# Altium PCB Sandshark 3D R1.2.PcbDoc (part 2 of 3)
Units mil, origin at the board's own origin, x right, y up, seen from the top; angles counter-clockwise.
Board outline 4143.89 x 2810.03 mil, 5 copper layers (Top Layer, Mid-Layer 1, Groun Plane, Power Plane, Bottom Layer), stack 75.73 mil thick; 280 components, 177 nets, 885 pads, 474 vias.
Unrouted connection lines stored in the file: 15.
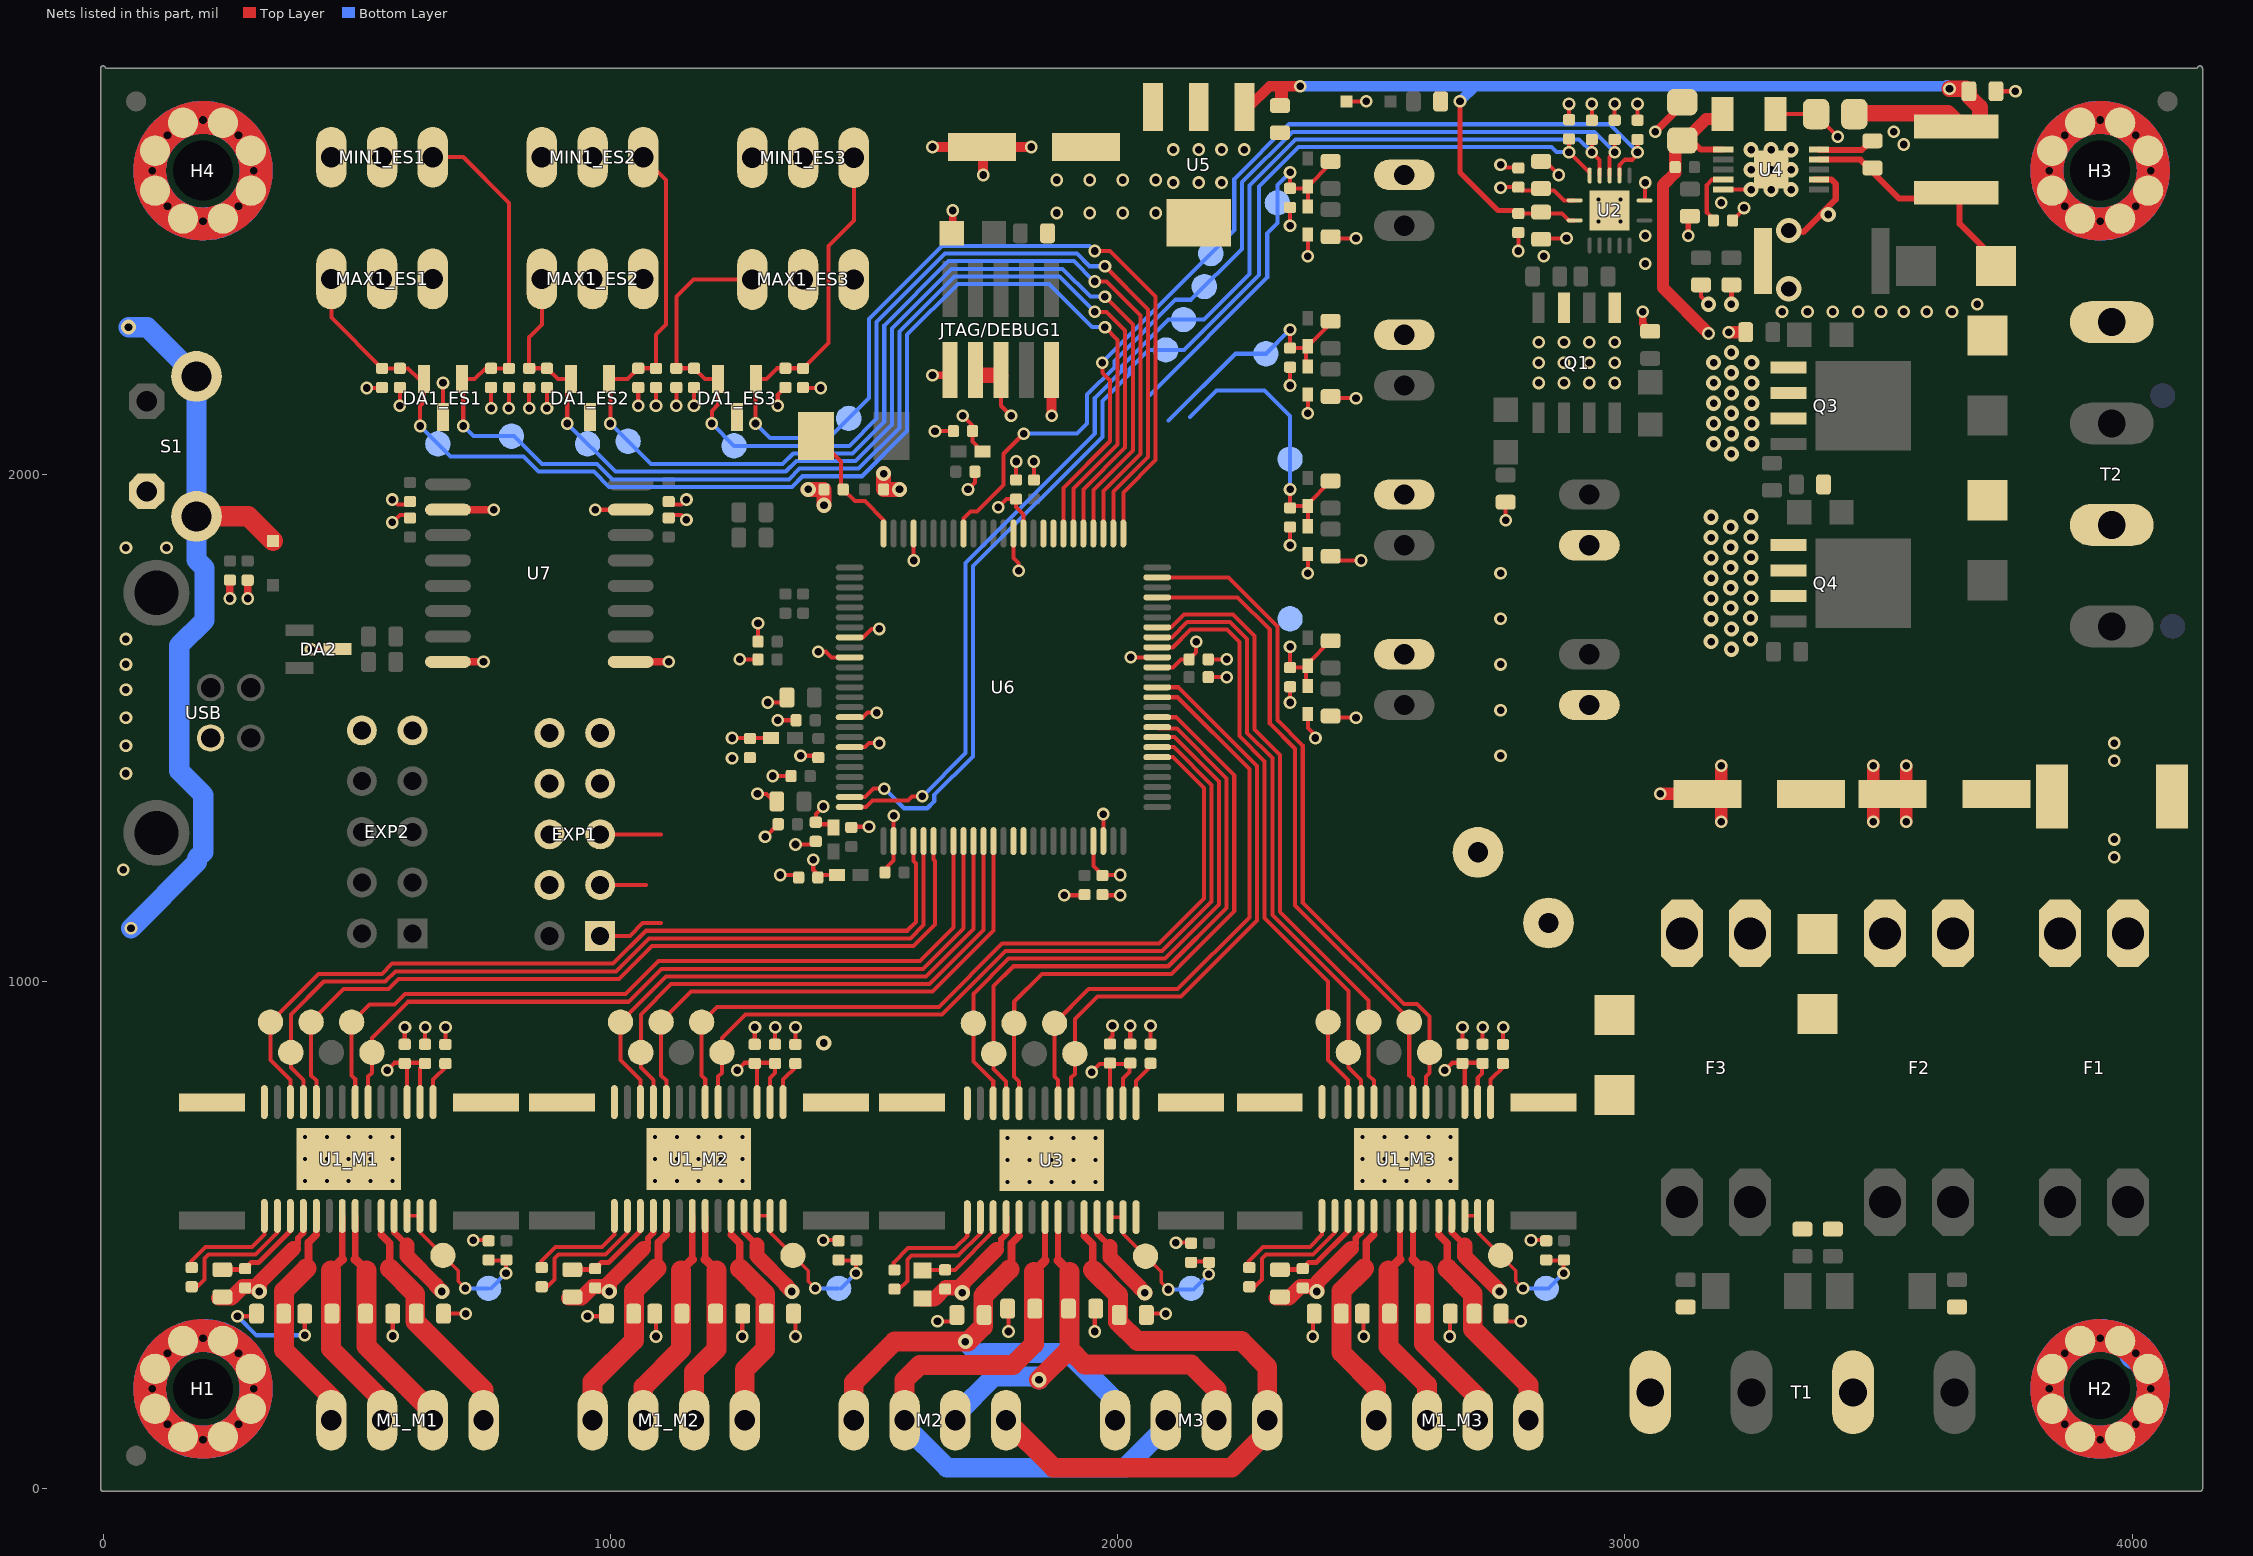
[diagram p4: the nets of this part, all layers, seen from the top]

## Via types
v1: diameter 25, hole 15, Top Layer to Bottom Layer, 243 vias
v2: diameter 30, hole 15, Top Layer to Bottom Layer, tented both sides, 72 vias
v3: diameter 19.68, hole 7.87, Top Layer to Bottom Layer, 64 vias
v4: diameter 25, hole 15, Top Layer to Bottom Layer, tented both sides, 51 vias
v5: diameter 30, hole 15, Top Layer to Bottom Layer, tented bottom, 32 vias
v6: diameter 30, hole 15, Top Layer to Bottom Layer, 10 vias
v7: diameter 50, hole 30, Top Layer to Bottom Layer, 2 vias

## Nets (pads, with @x,y where several pads share a name; then routed paths per layer and width w, separated by ;. In a path a pad name is that pad's centre, name@x,y a point inside that pad or via, vN(x,y) a via of type N, cw(c..) or ccw(c..) an arc to the next point about the centre after c; other vN are vias at no path point)
3.3VCC: C10_M1.1 C10_M2.1 C10_M3.1 C11_M1.1 C11_M2.1 C11_M3.1 C13.2 C16.2 C24.1 C25.1 C33.1 C41.2 C48.2 C49.2 C50.2 C52.2 C53.2 C55.2 EXP2.10 FB1.2 FB2.2 FB3.1 FB4.1 JTAG/DEBUG1.1 MAX1_ES1.3 MAX1_ES2.3 MAX1_ES3.3 MIN1_ES1.3 MIN1_ES2.3 MIN1_ES3.3 R1_ES1.2 R1_ES2.2 R1_ES3.2 R2_ES1.2 R2_ES2.2 R2_ES3.2 R30.2 R34.1 R41.2 R43_U_TR1.2 R43_U_TR2.2 R43_U_TR3.2 R43_U_TR4.2 U1_M1.16 U1_M1.17 U1_M2.16 U1_M2.17 U1_M3.16 U1_M3.17 U2.1 U3.16 U3.17 U5.3 U6.11 U6.72 U6.90 | length 2332.5
  Top Layer w8: v1(560,825) 574.74,839.74 C11_M1.1@597.99,839.74 ; v1(585,2135) R2_ES1.2@585,2171 ; U1_M1.17@599.41,762.2 C11_M1.1@599.41,833.78 ; C11_M1.1@599.41,838.32 C11_M1.1@597.99,839.74 ; U1_M1.16@625,762.2 C10_M1.1@625,828.82 ; C10_M1.1@634.69,838.5 633.45,839.74 C11_M1.1@597.99,839.74 ; v1(765,2130) R1_ES1.2@765,2171 ; v1(875,2130) R2_ES2.2@875,2171 ; v1(1055,2135) R1_ES2.2@1055,2171 ; v1(1165,2135) R2_ES3.2@1165,2171 ; v1(1240,1480) FB3.1@1316.38,1480 ; v1(1250,825) 1264.74,839.74 C11_M2.1@1287.99,839.74 ; C11_M2.1@1284.69,838.51 1289.41,833.78 U1_M2.17@1289.41,762.2 ; C11_M2.1@1289.41,838.32 C11_M2.1@1287.99,839.74 ; v1(1290,1370) 1308.23,1370 1328.23,1350 R41.2@1333.23,1355 ; v1(1310,1550) 1338.23,1550 R34.1@1348.23,1560 ; U1_M2.16@1315,762.2 1315,810 1324.69,819.69 C10_M2.1@1324.69,838.51 1323.45,839.74 C11_M2.1@1287.99,839.74 ; v1(1330,2135) 1330,2156 R1_ES3.2@1345,2171 ; v1(1400,1240) 1400,1220 1410.38,1209.62 1446,1209.62 FB1.2@1446.38,1210 ; v1(1420,1345) 1405,1330 C52.2@1405,1314 1405,1310 1433.62,1310 FB2.2@1440,1303.62 ; JTAG/DEBUG1.1@1669.92,2195 JTAG/DEBUG1.1@1670,2195.08 ; v4(1695,2115) 1714,2096 C55.2@1714,2085 1714,2064.62 FB4.1@1733.62,2045 ; v4(1765,1935) 1781,1951 C48.2@1800,1951 1800,1935 1814.37,1920.63 U6.11@1814.37,1883.15 ; v1(1948.74,821.38) 1964.74,837.38 C24.1@1983.74,837.38 ; U6.72@1952.17,1276.85 1952.17,1227.81 1970,1209.98 C50.2@1970,1209 1971,1210 v1(2005,1210) ; U3.17@1985.16,759.84 1985.16,835.96 C24.1@1983.74,837.38 ; U3.16@2008.74,761.85 U3.16@2010.75,759.84 2010.75,808.39 2023.74,821.38 C25.1@2023.74,836.38 ; C25.1@2023.74,837.38 C24.1@1983.74,837.38 ; U6.90@2078.15,1619.37 2109.37,1619.37 2125,1635 C49.2@2141,1635 2155,1649 v1(2155,1670) ; R43_U_TR4.2@2420,1838.23 2428.23,1830 v1(2480,1830) ; R43_U_TR2.2@2420,2153.23 2423.23,2150 v1(2470,2150) ; R43_U_TR1.2@2420,2468.23 2423.23,2465 2428.23,2470 2433.23,2465 v1(2470,2465) ; R43_U_TR3.2@2423.23,1520 v1(2470,1520) ; v1(2645,825) 2659.74,839.74 C11_M3.1@2682.99,839.74 ; U1_M3.17@2684.41,762.2 2684.41,838.32 C11_M3.1@2682.99,839.74 ; U1_M3.16@2710,762.2 2710,810 2718.45,818.45 2718.45,839.74 C11_M3.1@2682.99,839.74 ; v4(2755,2565) 2756,2566 C13.2@2790,2566 2796.32,2559.68 2860.32,2559.68 2880.32,2539.68 U2.1@2901.1,2539.68
  Top Layer w15: v1(1635,2195) JTAG/DEBUG1.1@1669.92,2195
  other v1: 1880,2515 1945,2515 2010,2515 2075,2515 1880,2580 1945,2580 2010,2580 2075,2580
+5VCC: C14.2 C15.2 C30.1 C31.1 C34.2 EXP1.10 L1.2 R25.2 R27.1 R29.2 U2.14 U5.1 | length 2307.6
  Top Layer w8: C14.2@2790,2514 2876,2514 2889.69,2500.31 U2.14@2901.1,2500.31
  Top Layer w10: v1(2675,2735) 2675,2595 2750,2520 C14.2@2789,2520 ; v1(3125,2470) R25.2@3125,2505.33 ; R27.1@3208.31,2378.66 3210,2376.97 v2@3210,2345
  Top Layer w20: U5.1@2250.55,2724.17 2259.17,2724.17 2300,2765 v1(2360,2765)
  Top Layer w25: C34.2@2323.23,2725 2323.23,2760.23
  Top Layer w32: C31.1@3448.31,2711.69 3637.05,2711.69 3653.31,2695.43 L1.2@3653.31,2685.58 ; v1(3640,2760) 3673.23,2760 C30.1@3678.23,2755 3678.23,2745.18 3700,2723.41 3700,2690 L1.2@3710,2680
  Bottom Layer w20: v1(2360,2765) 2705,2765 ; v1(2675,2735) 2705,2765 ; v1@3635,2765 2705,2765
  Bottom Layer w25: v1@3635,2765 v1(3640,2760)
  other v2: 3210,2335
+12VCC1: C3_M1.2 C3_M2.2 C3_M3.2 C17.1 C66.1 D25.C F3.2 R3_M1.2 R3_M2.2 R3_M3.2 R19.2 U1_M1.4 U1_M1.11 U1_M2.4 U1_M2.11 U1_M3.4 U1_M3.11 U3.4 U3.11 | length 1866.1
  Top Layer w12: 375.51,473.74 384.51,482.74 384.51,494.25 394.69,504.42 U1_M1.4@394.68,537.8 ; U1_M1.11@573.82,537.8 573.82,505.43 599.25,480 ; 1065.51,473.74 1074.51,482.74 1074.51,494.25 1084.69,504.42 U1_M2.4@1084.68,537.8 ; U1_M2.11@1263.82,537.8 1263.82,505.43 1289.25,480 ; 1761.26,471.38 1770.26,480.38 1770.26,491.89 1780.43,502.06 U3.4@1780.43,535.43 ; U3.11@1959.57,535.43 1959.57,503.07 1985,477.64 ; 2460.51,473.74 2469.51,482.74 2469.51,494.25 2479.69,504.42 U1_M3.4@2479.68,537.8 ; U1_M3.11@2658.82,537.8 2658.82,505.43 2684.25,480
  Top Layer w30: C3_M1.2@227.99,376.18 252.95,376.18 275.51,398.74 297.99,398.74 v2(307.99,388.74) 307.99,406.22 375.51,473.74 ; 599.25,480 599.25,458.69 656.75,401.19 656.75,399.98 v2(667.99,388.74) ; C3_M2.2@917.99,376.18 942.95,376.18 965.51,398.74 987.99,398.74 v2(997.99,388.74) 997.99,406.22 1065.51,473.74 ; 1289.25,480 1289.25,458.69 1346.75,401.19 1346.75,399.98 v2(1357.99,388.74) ; C17.1@1613.74,373.82 1638.7,373.82 1661.26,396.38 1683.74,396.38 v2(1693.74,386.38) 1693.74,403.86 1761.26,471.38 ; 1985,477.64 1985,456.33 2042.5,398.83 2042.5,397.62 v2(2053.74,386.38) ; C3_M3.2@2312.99,376.18 2337.95,376.18 2360.51,398.74 2382.99,398.74 v2(2392.99,388.74) 2392.99,406.22 2460.51,473.74 ; 2684.25,480 2684.25,458.69 2752.99,389.95 v2(2752.99,388.74)
+12VCC2: C27.1 C29.1 C65.1 D7.C D19.C F2.2 FAN-1.1 FAN-2.1 R7.2 R10.2 R13.2 R23.2 T2.4 U4.1 | length 675.5
  Top Layer w8: v1(2765.01,1908.99) R10.2@2765.01,1944.99
  Top Layer w12: C29.1@3140.68,2648.95 3149.83,2639.8 U4.1@3193.83,2639.8
  Top Layer w15: v1(3035,2320) 3035,2296.78 R7.2@3050,2281.77
  Top Layer w24: C29.1@3113.31,2658.02 3099.31,2644.02 R23.2@3099.31,2605.43 3099.31,2594.31 3075,2570 3075,2367.53 v4(3165,2277.53) ; C29.1@3113.31,2668.02 3128.17,2668.02 3160.57,2700.43 3171.15,2700.43 ; v4(3205,2280) R13.2@3238.23,2280
+12VCC3: C64.1 D10.C D17.C F1.2 R16.2 T2.2
AN1: C63_U_TR1.1 D23_U_TR1.A D24_U_TR1.C R44_U_TR1.1 TP26_U_TR1.1 | length 730.7
  Top Layer w8: v1(2340,2595) C63_U_TR1.1@2340,2563.7 2371.26,2563.7 D23_U_TR1.A@2375,2567.44 ; D24_U_TR1.C@2375,2527.56 D23_U_TR1.A@2375,2567.44 ; R44_U_TR1.1@2420,2616.77 2420,2612.44 D23_U_TR1.A@2375,2567.44
  Bottom Layer w8: 2062.43,2155 2295,2387.57 2295,2475 2315,2495 2315,2570 v1(2340,2595)
AN2: C63_U_TR2.1 D23_U_TR2.A D24_U_TR2.C R44_U_TR2.1 TP26_U_TR2.1 | length 481.6
  Top Layer w8: v1(2340,2285) C63_U_TR2.1@2340,2248.7 2371.26,2248.7 D24_U_TR2.C@2371.26,2216.3 ; D23_U_TR2.A@2375,2252.44 2420,2297.44 R44_U_TR2.1@2420,2301.77
  Bottom Layer w8: 2100.61,2105.61 2232.5,2237.5 TP26_U_TR2.1@2292.5,2237.5 v1(2340,2285)
AN3: C63_U_TR3.1 D23_U_TR3.A D24_U_TR3.C R44_U_TR3.1 TP26_U_TR3.1 | length 178.2
  Top Layer w8: v1(2340,1660) C63_U_TR3.1@2340,1618.7 2371.26,1618.7 2371.26,1586.3 D24_U_TR3.C@2375,1582.56 ; D23_U_TR3.A@2375,1622.44 2375,1626.77 R44_U_TR3.1@2420,1671.77
AN4: C63_U_TR4.1 D23_U_TR4.A D24_U_TR4.C R44_U_TR4.1 TP26_U_TR4.1 | length 565.7
  Top Layer w8: v1(2340,1970) C63_U_TR4.1@2340,1933.7 2343.74,1937.44 D23_U_TR4.A@2375,1937.44 ; D24_U_TR4.C@2375,1897.56 D23_U_TR4.A@2375,1937.44 ; R44_U_TR4.1@2420,1986.77 2375,1941.77 D23_U_TR4.A@2375,1937.44
  Bottom Layer w8: 2142.5,2112.5 2195,2165 2290,2165 2340,2115 v1(2340,1970)
BZR_PWM: EXP1.1 | length 130.4
  Top Layer w8: EXP1.1@980,1090 1038.79,1090 1063.79,1115 1100,1115
DIR1: TP8_M1.1 U1_M1.20 U6.59 | length 1557.4
  Top Layer w8: U1_M1.20@522.64,762.2 522.64,812.64 530,820 TP8_M1.1@530,860 530,888.93 601.07,960 1036.07,960 1101.07,1025 1616.36,1025 1696.26,1104.9 U6.59@1696.26,1276.85
DIR2: TP8_M2.1 U1_M2.20 U6.82 | length 1573.8
  Top Layer w8: U1_M2.20@1212.64,762.2 1212.64,812.64 1220,820 TP8_M2.1@1220,860 1220,888.93 1266.07,935 1653.79,935 1778.79,1060 2087.43,1060 2185,1157.57 2185,1387.72 2110.83,1461.89 U6.82@2078.15,1461.89
DIR3: TP8_M3.1 U1_M3.20 U6.99 | length 1356.5
  Top Layer w8: U6.99@2078.15,1796.54 2218.46,1796.54 2315,1700 2315,1515 2365,1465 2365,1156.07 2565.07,956 2589.91,956 2615,930.91 TP8_M3.1@2615,860 2615,820 2607.64,812.64 U1_M3.20@2607.64,762.2
DIR_Z: TP21.1 U3.20 U6.88 | length 1174.5
  Top Layer w8: U3.20@1908.39,759.84 1908.39,810.28 1915.75,817.64 TP21.1@1915.75,857.64 1915.75,925.75 1960,970 2124.71,970 2275,1120.29 2275,1425 2120,1580 U6.88@2078.15,1580
EN1: TP4_M1.1 U1_M1.21 U6.58 | length 1594.9
  Top Layer w8: U1_M1.21@497.05,762.2 497.05,807.95 490,815 TP4_M1.1@490,920 525,955 574.85,955 594.85,975 1029.85,975 1094.85,1040 1610.15,1040 1676.57,1106.43 U6.58@1676.57,1276.85
EN2: TP4_M2.1 U1_M2.21 U6.81 | length 1586.4
  Top Layer w8: U1_M2.21@1187.05,762.2 1187.05,807.95 1180,815 TP4_M2.1@1180,920 1210,950 1647.57,950 1772.57,1075 2081.21,1075 2170,1163.79 2170,1381.51 2109.3,1442.2 U6.81@2078.15,1442.2
EN3: TP4_M3.1 U1_M3.21 U6.97 | length 1296.5
  Top Layer w8: U6.97@2078.15,1757.17 2236.62,1757.17 2300,1693.79 2300,1508.79 2350,1458.79 2350,1149.85 2575,924.85 TP4_M3.1@2575,920 2575,815 2582.05,807.95 U1_M3.21@2582.05,762.2
EN_Z: TP17.1 U3.21 U6.87 | length 1164.2
  Top Layer w8: U3.21@1882.8,759.84 1882.8,805.59 1875.75,812.64 TP17.1@1875.75,917.64 1943.11,985 2118.49,985 2260,1126.51 2260,1418.79 2118.47,1560.32 U6.87@2078.15,1560.32
EXP1_CS: U6.8
EXP2_CS: U6.9
FAN0_PWM: R9.2 TP10.1 U2.2 U6.49 | length 2444.2
  Top Layer w8: U6.49@1471.85,1363.46 1502.25,1363.46 1518.79,1380 v1(1540,1380) ; R9.2@2890,2661 v1(2890,2635) U2.2@2930.63,2594.37
  Bottom Layer w8: v1(1540,1380) 1578.5,1341.5 1624.73,1341.5 1638.5,1355.27 1638.5,1367.29 1715,1443.79 1715,1818.79 1970,2073.79 1970,2144.34 2023.5,2197.84 2023.5,2207.29 2061.21,2245 2131.21,2245 2279,2392.79 2279,2567.23 2356.77,2645 2855,2645 2865,2635 v1(2890,2635)
FAN1_PWM: R12.2 TP11.1 U2.3 U6.50 | length 2464.9
  Top Layer w8: U6.50@1471.85,1343.78 1503.78,1343.78 1516.5,1356.5 1586.5,1356.5 1595,1365 v1(1615,1365) ; R12.2@2935,2660 v1(2935,2635) 2950.32,2619.68 U2.3@2950.32,2588.9
  Bottom Layer w8: v1(1615,1365) 1700,1450 1700,1825 1955,2080 1955,2150.55 2008.5,2204.05 2008.5,2213.5 2100,2305 TP11.1@2130,2305 2170,2305 2260,2395 2260,2569.45 2350.55,2660 2910,2660 v1(2935,2635)
FGND: D22.C H1.1 H2.1 H3.1 H4.1 S1.3 S1.4 | length 1551.2
  Top Layer w40: S1.4@184,1917 286.31,1917 D22.C@335,1868.31
  Bottom Layer w40: v6(50,2290) 87,2290 S1.3@184,2193 S1.4@184,1917 184,1831 200,1815 200,1712.41 150,1662.41 150,1415 197.25,1367.75 197.25,1254.79 185,1242.54 185,1235 v1(55,1105) ; 3862.76,122.6 H2.1@3867.01,126.85
  Bottom Layer w64.96: H2.1@4007.01,266.85 4011.25,271.1
GND: C1_ES1.2 C1_ES2.2 C1_ES3.2 C2_ES1.2 C2_ES2.2 C2_ES3.2 C5_M1.1 C5_M2.1 C5_M3.1 C6_M1.1 C6_M2.1 C6_M3.1 C7_M1.2 C7_M2.2 C7_M3.2 C8_M1.2 C8_M2.2 C8_M3.2 C9_M1.2 C9_M2.2 C9_M3.2 C10_M1.2 C10_M2.2 C10_M3.2 C11_M1.2 C11_M2.2 C11_M3.2 C12_M1.2 C12_M2.2 C12_M3.2 C13.1 C14.1 C15.1 C16.1 C19.1 C20.2 C21.2 C22.2 C23.2 C24.2 C25.2 C26.2 C27.2 C29.2 C30.2 C31.2 C32.2 C33.2 C34.1 C36.1 C37.1 C38.2 C40.1 C41.1 C42.1 C43.1 C44.1 C45.1 C46.1 C48.1 C49.1 C50.1 C51.1 C52.1 C53.1 C54.1 C55.1 C56.1 C57.2 C58.2 C62.2 C63_U_TR1.2 C63_U_TR2.2 C63_U_TR3.2 C63_U_TR4.2 C64.2 C65.2 C66.2 C67.2 C68.2 C69.2 C70.2 D17.A D18.A D19.A D24_U_TR1.A D24_U_TR2.A D24_U_TR3.A D24_U_TR4.A D25.A DA1_ES1.3 DA1_ES2.3 DA1_ES3.3 EXP1.9 EXP2.9 JTAG/DEBUG1.3 JTAG/DEBUG1.5 JTAG/DEBUG1.9 LED1.C MAX1_ES1.2 MAX1_ES2.2 MAX1_ES3.2 MIN1_ES1.2 MIN1_ES2.2 MIN1_ES3.2 P2_U_TR1.2 P2_U_TR2.2 P2_U_TR3.2 P2_U_TR4.2 Q1.1 Q1.3 Q3.1 Q3.2 Q3.3 Q4.1 Q4.2 Q4.3 R5_M1.1 R5_M2.1 R5_M3.1 R6_M1.1 R6_M2.1 R6_M3.1 R9.1 R12.1 R15.1 R18.1 R21.1 R22.1 R26.1 R28.2 R35.1 S1.2 T1.2 T1.4 U1_M1.14 U1_M1.28 U1_M1.29 U1_M2.14 U1_M2.28 U1_M2.29 U1_M3.14 U1_M3.28 U1_M3.29 U2.7 U2.15 U3.14 U3.28 U3.29 U4.5 U4.7 U4.11 U5.2 U5.4 U6.12 U6.22 U6.33 U6.35 U6.41 U6.44 U6.52 U6.73 U6.91 U7.9 U7.15 | length 5422.6
  Top Layer w8: v1(265,340) C7_M1.2@297.48,340 ; v1(397.48,302.52) C8_M1.2@397.48,345 ; v1(520,2170) C2_ES1.2@549,2170 ; v1(571.02,301.02) C12_M1.2@571.02,345 ; C11_M1.2@594.69,876.2 594.69,909.68 v1(595,910) ; C10_M1.2@634.69,876.2 634.69,909.68 v1(635,910) ; DA1_ES1.3@670,2112.6 v1(670,2180) ; C9_M1.2@671.02,345 v1(715,345) ; C5_M1.1@675,876.52 v1(675,910) ; v4(730,490) C6_M1.1@758.7,490 ; v1(800,2130) C1_ES1.2@800,2171 ; v1(840,2130) C2_ES2.2@840,2171 ; v1(955,340) 987.48,340 C7_M2.2@992.48,345 ; v1(970,1930) U7.15@1040.12,1930 ; C8_M2.2@1087.48,345 1090,342.48 v1(1090,300) ; v1(1090,2135) C1_ES2.2@1090,2171 ; C57.2@1115,1914 1121,1920 1140,1920 v1(1150,1910) ; C58.2@1115,1946 1121,1940 1140,1940 v1(1150,1950) ; v1(1130,2135) C2_ES3.2@1130,2171 ; v1(1255,1635) C38.2@1291,1635 ; v1(1260,300) 1260,343.98 C12_M2.2@1261.02,345 ; C11_M2.2@1284.69,876.2 1284.69,909.69 v1(1285,910) ; R35.1@1291.1,1670 v1(1291.1,1706) ; v1(1305,1285) 1306,1285 C62.2@1331,1310 ; v1(1320,1405) C43.1@1356.3,1405 ; C10_M2.2@1324.69,876.2 1324.69,909.69 v1(1325,910) ; v1(1330,1515) C44.1@1366.3,1515 ; v1(1335,1210) C41.1@1371.3,1210 ; C9_M2.2@1361.02,345 1365,341.02 v1(1365,300) ; C5_M2.1@1365,876.52 v1(1365,910) ; v1(1365,1270) 1398.7,1270 C52.1@1405,1276.3 ; v1(1375,1445) 1406.3,1445 C54.1@1410,1441.3 ; C1_ES3.2@1380,2171 1381,2170 v1(1415,2170) ; v1(1410,1650) 1425,1650 1435.94,1639.06 U6.35@1471.85,1639.06 ; v4(1420,490) C6_M2.1@1448.7,490 ; U6.44@1471.85,1461.89 1501.89,1461.89 1510,1470 v1(1530,1470) ; U6.41@1471.85,1520.94 1497.73,1520.94 1506.78,1530 v1(1525,1530) ; U6.33@1471.85,1678.43 1498.43,1678.43 1515,1695 v1(1530,1695) ; C51.1@1475,1303.7 1476.3,1305 v1(1510,1305) ; C40.1@1546.3,1210 1546.3,1226.3 1558.46,1238.46 U6.52@1558.46,1276.85 v1(1558.46,1326.54) ; v1(1597.83,1830) U6.22@1597.83,1883.15 ; v1(1640,2085) C55.1@1676.3,2085 ; v1(1645,330) 1670.59,330 C21.2@1683.23,342.64 ; v1(1705,1970) 1718.7,1983.7 C56.1@1718.7,2005 ; JTAG/DEBUG1.5@1770,2195.08 1770,2135 v1(1790,2115) ; C22.2@1783.23,355 1785,353.23 v1(1785,310) ; U6.12@1794.68,1883.15 1795,1882.83 1795,1835 1805,1825 v1(1805,1810) ; C48.1@1800,1988.7 v1(1800,2025) ; C42.1@1835,1988.7 v1(1835,2025) ; v1(1895,1170) C45.1@1933.7,1170 ; v1(1955,310) 1955,353.23 C26.2@1956.77,355 ; C50.1@1970,1171.3 1971.3,1170 v1(2005,1170) ; U6.73@1971.85,1276.85 v1(1971.85,1330) ; C24.2@1985,876.64 1985,887.64 1990,892.64 v1(1990,912.64) ; C25.2@2025,876.64 v1(2025,912.64) ; v1(2025.94,1639.06) U6.91@2078.15,1639.06 ; C23.2@2056.77,342.64 2059.13,345 v1(2095,345) ; C19.1@2065,876.34 v1(2065,912.64) ; v4(2115,485) C20.2@2144,485 ; C46.1@2178.7,1600 v1(2215,1600) ; C49.1@2178.7,1635 v1(2215,1635) ; v1(2340,1550) C63_U_TR3.2@2340,1581 ; v1(2340,1860) C63_U_TR4.2@2340,1896 ; v1(2340,2175) C63_U_TR2.2@2340,2211 ; v1(2340,2490) C63_U_TR1.2@2340,2526 ; D24_U_TR3.A@2375,1527.44 2375,1500 2390,1485 v1(2390,1480) ; v1(2375,1805) D24_U_TR4.A@2375,1842.44 ; v1(2375,2120) D24_U_TR2.A@2375,2157.44 ; v1(2375,2430) D24_U_TR1.A@2375,2472.44 ; v1(2385,300) 2385,342.52 C7_M3.2@2387.48,345 ; D18.A@2451,2735 v1(2490,2735) ; C8_M3.2@2482.48,345 2485,342.48 v1(2485,300) ; v1(2655,300) C12_M3.2@2655,343.98 ; C11_M3.2@2679.69,876.2 2679.69,909.69 v1(2680,910) ; C10_M3.2@2719.69,876.2 2719.69,909.69 v1(2720,910) ; v1@2755,2605 2788.7,2605 C13.1@2790,2603.7 ; C9_M3.2@2756.02,345 2771.02,330 v1(2795,330) ; C5_M3.1@2760,876.52 v1(2760,910) ; v1(2790,2440) C14.1@2790,2476.3 ; v4(2815,490) C6_M3.1@2843.7,490 ; C16.1@2835,2616.77 2843.23,2616.77 v1(2870,2590) ; C15.1@2836.77,2465 v1(2885,2465) ; R9.1@2890,2698.9 v1(2890,2730) ; R12.1@2935,2697.9 v1(2935,2730) ; R15.1@2980,2697.9 v1(2980,2730) ; R18.1@3025,2697.9 v1(3025,2730) ; U2.7@3040,2543.58 v1(3040,2575) ; C29.2@3113.31,2728.31 C29.2@3113.31,2733.43 ; R28.2@3153.32,2378.65 3150,2375.33 3150,2350 v2(3165,2335) ; U4.5@3193.83,2561.06 v6(3248.94,2561.06) ; C32.2@3212.31,2500.43 3235,2523.11 v1(3235,2525) ; C27.2@3297.17,2710 3375,2710 v1(3420,2665) ; C30.2@3731.77,2755 v1(3770,2755)
  Top Layer w12: 3351.42,2477.41 3415.88,2541.87 3415.88,2572.35 3407.49,2580.74 U4.7@3382.8,2580.74 U4.7@3372.96,2580.74
  Top Layer w15: U7.9@1040.12,1630 v1(1115,1630) ; LED1.C@1675,2477 v4(1675,2520) ; v1(3060,2675) C29.2@3113.31,2728.31
  Top Layer w20: v1(1635,2645) C33.2@1732.64,2645 v1(1830,2645) ; v1(1735,2590) C33.2@1735,2642.64 ; v1(1870,2115) JTAG/DEBUG1.9@1870,2195.08
  Top Layer w25: v1(3070,1370) C65.2@3162.64,1370 ; v1(3190,1315) v1(3190,1425) ; v1(3490,1315) v1(3490,1425) ; v1(3555,1315) v1(3555,1425)
  Top Layer w30: v2(1390,1970) C36.1@1421.3,1970 v2(1421.3,1938.7) ; v2(1538.7,2001.3) C37.1@1538.7,1970 v2(1570,1970) ; JTAG/DEBUG1.3@1720,2195.08 JTAG/DEBUG1.5@1770,2195.08
  Bottom Layer w8: v1(265,340) 302.48,302.52 v1(397.48,302.52)
  other v1: 3965,1245 3965,1280 3965,1435 1240,1440 3965,1470 2830,2180 2880,2180 2930,2180 2980,2180 2830,2220 2880,2220 2930,2220 2980,2220 2830,2260 2880,2260 2930,2260 2980,2260 3310,2320 3360,2320 3410,2320 3460,2320 3505,2320 3550,2320 3595,2320 3645,2320 3695,2335 3040,2415 2840,2430 3040,2470 3190,2535 2755,2610 3550,2650 3530,2675
  other v2: 1420.51,878.74 3210,1655 3170,1670 3247.98,1675 3210,1695 3170,1715 3247.98,1716.5 3208.78,1736.5 3170,1755 3248.78,1756 3208.78,1776 3170,1795 3248.78,1796 3208.78,1816 3170,1835 3248.78,1836 3208.78,1856 3170,1875 3248.78,1876 3208.78,1896 3170,1915 3248.78,1916 3210,2040 3175,2060 3250,2060 3210,2080 3175,2100 3250,2100 3210,2120 3175,2140 3250,2140 3210,2160 3175,2180 3250,2180 3210,2200 3175,2220 3250,2220 3210,2240 3401,2512
  other v3: 1783.39,604.33 1826.69,604.33 1870,604.33 1913.31,604.33 1956.61,604.33 397.64,606.69 440.94,606.69 484.25,606.69 527.56,606.69 570.87,606.69 1087.64,606.69 1130.94,606.69 1174.25,606.69 1217.56,606.69 1260.87,606.69 2482.64,606.69 2525.94,606.69 2569.25,606.69 2612.56,606.69 2655.87,606.69 1783.39,647.64 1826.69,647.64 1870,647.64 1913.31,647.64 1956.61,647.64 397.64,650 440.94,650 484.25,650 527.56,650 570.87,650 1087.64,650 1130.94,650 1174.25,650 1217.56,650 1260.87,650 2482.64,650 2525.94,650 2569.25,650 2612.56,650 2655.87,650 1783.39,690.95 1826.69,690.95 1870,690.95 1913.31,690.95 1956.61,690.95 397.64,693.31 440.94,693.31 484.25,693.31 527.56,693.31 570.87,693.31 1087.64,693.31 1130.94,693.31 1174.25,693.31 1217.56,693.31 1260.87,693.31 2482.64,693.31 2525.94,693.31 2569.25,693.31 2612.56,693.31 2655.87,693.31 2948.35,2498.35 2991.65,2498.35 2948.35,2541.65 2991.65,2541.65
  other v4: 2755,1445 2755,1535 2755,1625 2755,1715 2755,1805 2110,2575 2160,2575 2205,2575 2110,2640 2160,2640 2205,2640 2250,2640
  other v6: 3288.31,2561.06 3327.68,2561.06 3248.94,2600.43 3288.31,2600.43 3327.68,2600.43 3248.94,2639.8 3288.31,2639.8 3327.68,2639.8
  other v7: 3323.31,2365.43 3323.31,2480.43
HEATBED_PWM: R18.2 TP15.1 U2.5 U6.7 | length 1807.8
  Top Layer w8: U6.7@1893.11,1883.15 1893.11,1973.11 1985,2065 1985,2185 1970,2200 v1(1970,2220) ; U2.5@2989.69,2588.9 2989.69,2609.69 3000,2620 3015,2620 3025,2630 v1(3025,2635) R18.2@3025,2660
  Bottom Layer w8: v1(1970,2220) 1970,2221.21 2230,2481.21 2230,2581.87 2338.13,2690 2970,2690 v1(3025,2635)
HEATER_PWM: R15.2 TP13.1 U2.4 U6.17 | length 1874.8
  Top Layer w8: U6.17@1696.26,1883.15 1696.26,1912.76 1710,1926.5 1722.71,1926.5 1775.37,1979.16 1775.37,2040.37 v1(1815,2080) ; U2.4@2970,2588.9 2970,2625 v1(2980,2635) R15.2@2980,2660
  Bottom Layer w8: v1(1815,2080) 1920,2080 1940,2100 1940,2156.77 1993.5,2210.27 1993.5,2223.5 2114,2344 2144.91,2344 2245,2444.09 2245,2575.66 2344.34,2675 2940,2675 v1(2980,2635)
I2C_SCL: U6.65
I2C_SDA: U6.64
INPUT_GND: C59.2 C60.2 C61.1 DA2.3 R42.1 U7.2 U7.8 USB.4 | length 367
  Top Layer w8: v1(410,1655) DA2.3@462.4,1655 ; v1(570,1905) 585,1920 599,1920 C60.2@605,1914 ; v1(570,1950) 580,1940 595,1940 601,1946 C59.2@605,1946
  Top Layer w15: v1(250,1755) C61.1@250,1789.5 ; v1(285,1755) R42.1@285,1789.5 ; U7.8@679.88,1630 v1(750,1630) ; U7.2@679.88,1930 v1(770,1930)
  other v4: 40,1220 45,1410 45,1465 45,1520 45,1575 45,1625 45,1675 45,1855 125,1855
LCD4: EXP1.5 | length 120
  Top Layer w8: EXP1.5@980,1290 1100,1290
LCD5: EXP1.6
LCD6: EXP1.7
LCD7: EXP1.8
LCDE: EXP1.3 | length 90
  Top Layer w8: EXP1.3@980,1190 1070,1190
LCDRS: EXP1.4
MAX_ES1: C2_ES1.1 DA1_ES1.2 MAX1_ES1.1 R2_ES1.1 TP2_ES1.1 U6.6 | length 2569.8
  Top Layer w8: MAX1_ES1.1@450,2385 450,2308.7 C2_ES1.1@550,2208.7 601.3,2208.7 622.6,2187.4 DA1_ES1.2@632.6,2187.4 632.6,2142.6 625,2135 v1(625,2095) ; U6.6@1912.8,1883.15 1912.8,1971.58 2000,2058.79 2000,2265 v4(1975,2290)
  Bottom Layer w8: v1(625,2095) 685,2035 828.79,2035 858.79,2005 967.57,2005 997.57,1975 1358.23,1975 1379.23,1996 1495.85,1996 1585,2085.15 1585,2275 1685,2375 1865,2375 1950,2290 v4(1975,2290)
MAX_ES2: C2_ES2.1 DA1_ES2.2 MAX1_ES2.1 R2_ES2.1 TP2_ES2.1 U6.4 | length 2289.7
  Top Layer w8: MAX1_ES2.1@865,2385 865,2295 840,2270 C2_ES2.1@840,2208.7 840.2,2208.9 R2_ES2.1@875,2208.9 896.5,2187.4 DA1_ES2.2@922.6,2187.4 915,2179.8 v1(915,2100) ; U6.4@1952.17,1883.15 1952.17,1968.53 2030,2046.36 2030,2295 v4(1975,2350)
  Bottom Layer w8: v1(915,2100) 1010,2005 1345.8,2005 1366.8,2026 1483.43,2026 1555,2097.57 1555,2287.43 1672.57,2405 1891.21,2405 1946.21,2350 v4(1975,2350)
MAX_ES3: C2_ES3.1 DA1_ES3.2 MAX1_ES3.1 R2_ES3.1 TP2_ES3.1 U6.2 | length 2151.8
  Top Layer w8: v1(1200,2100) 1200,2125 1212.6,2137.6 DA1_ES3.2@1212.6,2187.4 1186.5,2187.4 R2_ES3.1@1165,2208.9 1130.2,2208.9 C2_ES3.1@1130,2208.7 1130,2350 1164,2384 MAX1_ES3.1@1280,2384 ; v4(1975,2410) 2060,2325 2060,2033.93 1991.54,1965.47 U6.2@1991.54,1883.15
  Bottom Layer w8: v1(1200,2100) TP2_ES3.1@1244,2056 1471,2056 1525,2110 1525,2299.85 1660.15,2435 1920,2435 1945,2410 v4(1975,2410)
MIN_ES1: C1_ES1.1 DA1_ES1.1 MIN1_ES1.1 R1_ES1.1 TP1_ES1.1 U6.5 | length 2805.8
  Top Layer w8: MIN1_ES1.1@650,2625 710,2625 800,2535 C1_ES1.1@800,2208.7 753.7,2208.7 732.4,2187.4 715,2187.4 710,2182.4 v1(710,2095) ; U6.5@1932.48,1883.15 1932.48,1970.05 2015,2052.57 2015,2283.23 1978.23,2320 v4(1955,2320)
  Bottom Layer w8: v1(710,2095) 730,2075 810,2075 865,2020 973.79,2020 1003.79,1990 1352.02,1990 1373.02,2011 1489.64,2011 1570,2091.36 1570,2281.21 1678.79,2390 1885,2390 v4(1955,2320)
MIN_ES2: C1_ES2.1 DA1_ES2.1 MIN1_ES2.1 R1_ES2.1 TP1_ES2.1 U6.3 | length 2489.3
  Top Layer w8: DA1_ES2.1@997.4,2187.4 1033.5,2187.4 R1_ES2.1@1055,2208.9 1089.8,2208.9 C1_ES2.1@1090,2208.7 1090,2275 1110,2295 1110,2580 MIN1_ES2.1@1065,2625 ; v1(1000,2100) DA1_ES2.1@1000,2184.8 ; v4(1955,2380) 1978.23,2380 2045,2313.23 2045,2040.15 1971.85,1967 U6.3@1971.85,1883.15
  Bottom Layer w8: v1(1000,2100) 1080,2020 1339.59,2020 1360.59,2041 1477.21,2041 1540,2103.79 1540,2293.64 1666.36,2420 1913.79,2420 1953.79,2380 v4(1955,2380)
MIN_ES3: C1_ES3.1 DA1_ES3.1 MIN1_ES3.1 R1_ES3.1 TP1_ES3.1 U6.1 | length 2229.9
  Top Layer w8: v1(1286.21,2100) 1286.21,2186.21 DA1_ES3.1@1287.4,2187.4 1307.4,2187.4 1328.9,2208.9 R1_ES3.1@1345,2208.9 1380.2,2208.9 1430,2258.7 1430,2450 1480,2500 MIN1_ES3.1@1480,2624 ; v4(1955,2440) 1985,2440 2075,2350 2075,2027.72 2011.22,1963.94 U6.1@2011.22,1883.15
  Bottom Layer w8: v1(1286.21,2100) 1315.21,2071 1431,2071 1510,2150 1510,2306.07 1653.93,2450 1945,2450 v4(1955,2440)
MOD0E1: TP7_M1.1 U1_M1.24 U6.56 | length 1638.1
  Top Layer w8: U1_M1.24@420.28,762.2 420.28,804.72 410,815 TP7_M1.1@410,920 410,921.21 473.79,985 562.43,985 582.43,1005 1017.43,1005 1082.43,1070 1597.72,1070 1640,1112.28 1640,1237.43 1637.2,1240.22 U6.56@1637.2,1276.85
MOD0E2: TP7_M2.1 U1_M2.24 U6.62 | length 1069.3
  Top Layer w8: U1_M2.24@1110.28,762.2 1110.28,804.72 1100,815 TP7_M2.1@1100,920 1100,921.21 1158.79,980 1635,980 1755.32,1100.32 U6.62@1755.32,1276.85
MOD0E3: TP7_M3.1 U1_M3.24 U6.94 | length 1236.4
  Top Layer w8: U6.94@2078.15,1698.11 2105.68,1698.11 2131.07,1723.5 2227.86,1723.5 2270,1681.36 2270,1496.36 2320,1446.36 2320,1137.43 2495,962.43 TP7_M3.1@2495,920 2495,815 2505.28,804.72 U1_M3.24@2505.28,762.2
MOD0E_Z: TP20.1 U3.24 U6.85 | length 1179.2
  Top Layer w8: U3.24@1806.02,759.84 1806.02,802.36 1795.75,812.64 TP20.1@1795.75,917.64 1796.26,918.15 1796.26,960.05 1851.21,1015 2106.07,1015 2230,1138.93 2230,1406.36 2115.42,1520.94 U6.85@2078.15,1520.94
MOD1E1: TP6_M1.1 U1_M1.25 U6.55 | length 1669.3
  Top Layer w8: U1_M1.25@394.68,762.2 394.68,805.31 370,830 TP6_M1.1@370,860 370,935 435,1000 556.21,1000 576.21,1020 1011.21,1020 1076.21,1085 1591.51,1085 1617.52,1111.01 U6.55@1617.52,1276.85
MOD1E2: TP6_M2.1 U1_M2.25 U6.61 | length 1102.8
  Top Layer w8: U1_M2.25@1084.68,762.2 1084.68,805.32 1060,830 TP6_M2.1@1060,860 1060,935 1120,995 1628.79,995 1735.63,1101.84 U6.61@1735.63,1276.85
MOD1E3: TP6_M3.1 U1_M3.25 U6.93 | length 1209.1
  Top Layer w8: U6.93@2078.15,1678.43 2107.21,1678.43 2137.29,1708.5 2221.65,1708.5 2255,1675.15 2255,1490.15 2305,1440.15 2305,1131.21 2455,981.21 TP6_M3.1@2455,860 2455,830 2479.68,805.32 U1_M3.25@2479.68,762.2
MOD1E_Z: TP19.1 U3.25 U6.84 | length 1194.1
  Top Layer w8: U3.25@1780.43,759.84 1780.43,802.95 1755.75,827.64 TP19.1@1755.75,857.64 1755.75,990.75 1795,1030 2099.85,1030 2215,1145.15 2215,1400.15 2116.67,1498.48 U6.84@2080.93,1498.48
MOD2E1: TP5_M1.1 U1_M1.26 U6.54 | length 1689.8
  Top Layer w8: U1_M1.26@369.09,762.2 369.09,805.91 330,845 TP5_M1.1@330,920 425,1015 550,1015 570,1035 1005,1035 1070,1100 1585.29,1100 1602.52,1117.23 1602.52,1232.48 1597.83,1237.17 U6.54@1597.83,1276.85
MOD2E2: TP5_M2.1 U1_M2.26 U6.60 | length 1119.4
  Top Layer w8: U1_M2.26@1059.09,762.2 1059.09,805.91 1020,845 TP5_M2.1@1020,920 1110,1010 1622.57,1010 1715.94,1103.37 U6.60@1715.94,1276.85
MOD2E3: TP5_M3.1 U1_M3.26 U6.92 | length 1181.8
  Top Layer w8: U6.92@2078.15,1658.74 2108.74,1658.74 2143.5,1693.5 2215.43,1693.5 2240,1668.93 2240,1483.93 2290,1433.93 2290,1125 2415,1000 TP5_M3.1@2415,920 2415,845 2454.09,805.91 U1_M3.26@2454.09,762.2
MOD2E_Z: TP18.1 U3.26 U6.83 | length 1189.8
  Top Layer w8: U3.26@1754.84,759.84 1754.84,803.54 1715.75,842.64 TP18.1@1715.75,917.64 1715.75,975.75 1785,1045 2093.64,1045 2200,1151.36 2200,1393.93 2112.36,1481.57 U6.83@2078.15,1481.57
NetC3_M1_1: C3_M1.1 R3_M1.1 U1_M1.3 | length 192.4
  Top Layer w10: C3_M1.1@235,431.77 R3_M1.1@277.87,431.77 ; R3_M1.1@280,433.9 291.86,445.76 306.72,445.76 369.09,508.13 U1_M1.3@369.09,537.8
NetC3_M2_1: C3_M2.1 R3_M2.1 U1_M2.3 | length 192.4
  Top Layer w10: C3_M2.1@925,431.77 R3_M2.1@967.87,431.77 ; R3_M2.1@970,433.9 981.86,445.76 996.72,445.76 1059.09,508.13 U1_M2.3@1059.09,537.8
NetC3_M3_1: C3_M3.1 R3_M3.1 U1_M3.3 | length 192.4
  Top Layer w10: C3_M3.1@2320,431.77 R3_M3.1@2362.87,431.77 ; R3_M3.1@2365,433.9 2376.86,445.76 2391.72,445.76 2454.09,508.13 U1_M3.3@2454.09,537.8
NetC4_M1_1: C4_M1.1 U1_M1.1 | length 219.5
  Top Layer w8: C4_M1.1@172.99,432.44 172.99,448.31 201.44,476.76 293.88,476.76 317.91,500.79 U1_M1.1@317.91,537.8
NetC4_M1_2: C4_M1.2 U1_M1.2 | length 273.2
  Top Layer w8: C4_M1.2@172.99,394.74 182.22,394.74 199.69,412.2 199.69,453.78 207.66,461.76 300.1,461.76 343.5,505.16 U1_M1.2@343.5,537.8
NetC4_M2_1: C4_M2.1 U1_M2.1 | length 219.5
  Top Layer w8: C4_M2.1@862.99,432.44 862.99,448.31 891.44,476.76 983.88,476.76 1007.91,500.79 U1_M2.1@1007.91,537.8
NetC4_M2_2: C4_M2.2 U1_M2.2 | length 273.2
  Top Layer w8: C4_M2.2@862.99,394.74 872.22,394.74 889.69,412.2 889.69,453.79 897.66,461.76 990.1,461.76 1033.5,505.16 U1_M2.2@1033.5,537.8
NetC4_M3_1: C4_M3.1 U1_M3.1 | length 219.5
  Top Layer w8: C4_M3.1@2257.99,432.44 2257.99,448.31 2286.44,476.76 2378.88,476.76 2402.91,500.79 U1_M3.1@2402.91,537.8
NetC4_M3_2: C4_M3.2 U1_M3.2 | length 273.2
  Top Layer w8: C4_M3.2@2257.99,394.74 2267.22,394.74 2284.69,412.2 2284.69,453.79 2292.66,461.76 2385.1,461.76 2428.5,505.16 U1_M3.2@2428.5,537.8
NetC5_M1_2: C5_M1.2 U1_M1.15 | length 88.9
  Top Layer w8: U1_M1.15@650.59,762.2 650.59,806.34 677.99,833.74 C5_M1.2@677.99,839.74
NetC5_M2_2: C5_M2.2 U1_M2.15 | length 88.9
  Top Layer w8: U1_M2.15@1340.59,762.2 1340.59,806.34 1367.99,833.74 C5_M2.2@1367.99,839.74
NetC5_M3_2: C5_M3.2 U1_M3.15 | length 88.9
  Top Layer w8: U1_M3.15@2735.59,762.2 2735.59,806.34 2762.99,833.74 C5_M3.2@2762.99,839.74
NetC6_M1_2: C6_M1.2 R4_M1.2 TP3_M1.1 TP24_M1.1 U1_M1.12 U1_M1.13 | length 346.8
  Top Layer w7: U1_M1.12@599.41,537.8 U1_M1.13@625,537.8 625,505 700,430 700,409.25 v4(714.25,395)
  Top Layer w8: C6_M1.2@765.25,450 794.25,450 v4(794.25,425)
  Bottom Layer w8: v4(714.25,395) TP3_M1.1@759.25,395 ; TP3_M1.1@764.25,395 v4(794.25,425)
NetC6_M2_2: C6_M2.2 R4_M2.2 TP3_M2.1 TP24_M2.1 U1_M2.12 U1_M2.13 | length 346.8
  Top Layer w7: U1_M2.12@1289.41,537.8 U1_M2.13@1315,537.8 1315,505 1390,430 1390,409.25 v4(1404.25,395)
  Top Layer w8: C6_M2.2@1455.25,450 1484.25,450 v4(1484.25,425)
  Bottom Layer w8: v4(1404.25,395) TP3_M2.1@1449.25,395 ; TP3_M2.1@1454.25,395 v4(1484.25,425)
NetC6_M3_2: C6_M3.2 R4_M3.2 TP3_M3.1 TP24_M3.1 U1_M3.12 U1_M3.13 | length 355.3
  Top Layer w7: U1_M3.12@2684.41,537.8 U1_M3.13@2710,537.8 2710,505 2785,430 2785,409.25 v4(2799.25,395)
  Top Layer w8: C6_M3.2@2844.25,456 2850.25,450 2879.25,450 v4(2879.25,425)
  Bottom Layer w8: v4(2799.25,395) TP3_M3.1@2844.25,395 ; TP3_M3.1@2849.25,395 v4(2879.25,425)
NetC7_M1_1: C7_M1.1 M1_M1.4 U1_M1.5 | length 468
  Top Layer w12: 420.28,501.02 U1_M1.5@420.28,537.8
  Top Layer w15: 401.25,434.48 405.01,438.24 405.01,485.76 420.28,501.02
  Top Layer w39: 401.25,434.48 356.41,389.64 356.41,273.59 450,180 M1_M1.4@450,135
NetC7_M2_1: C7_M2.1 M1_M2.4 U1_M2.5 | length 463
  Top Layer w12: 1110.28,501.02 U1_M2.5@1110.28,537.8
  Top Layer w15: 1091.25,434.48 1095.01,438.24 1095.01,485.76 1110.28,501.02
  Top Layer w39: M1_M2.4@965,135 965,210.75 1046.41,292.16 1046.41,389.64 1091.25,434.48
NetC7_M3_1: C7_M3.1 M1_M3.4 U1_M3.5 | length 457.7
  Top Layer w12: 2505.28,501.02 U1_M3.5@2505.28,537.8
  Top Layer w15: 2486.25,434.48 2490.01,438.24 2490.01,485.76 2505.28,501.02
  Top Layer w39: 2486.25,434.48 2441.41,389.64 2441.41,268.59 2510,200 M1_M3.4@2510,135
NetC8_M1_1: C8_M1.1 M1_M1.3 U1_M1.7 | length 453.7
  Top Layer w12: 471.46,452.2 U1_M1.7@471.46,537.8
  Top Layer w18: 449.25,430 471.46,452.2
  Top Layer w39: 449.25,430 449.25,275.75 550,175 M1_M1.3@550,135
NetC8_M2_1: C8_M2.1 M1_M2.3 U1_M2.7 | length 442.7
  Top Layer w12: 1161.46,452.2 U1_M2.7@1161.46,537.8
  Top Layer w18: 1139.25,430 1161.46,452.2
  Top Layer w39: M1_M2.3@1065,135 1065,200.75 1139.25,275 1139.25,430
NetC8_M3_1: C8_M3.1 M1_M3.3 U1_M3.7 | length 443.4
  Top Layer w12: 2556.46,452.2 U1_M3.7@2556.46,537.8
  Top Layer w18: 2534.25,430 2556.46,452.2
  Top Layer w39: 2534.25,430 2534.25,279.95 2610,204.2 M1_M3.3@2610,135
NetC9_M1_1: C9_M1.1 M1_M1.1 U1_M1.10 | length 486.4
  Top Layer w12: 548.23,501.02 U1_M1.10@548.23,537.8
  Top Layer w15: 548.23,501.02 565.25,484 565.25,434
  Top Layer w39: 565.25,434 615.25,384 615.25,329.75 750,195 M1_M1.1@750,135
NetC9_M2_1: C9_M2.1 M1_M2.1 U1_M2.10 | length 447.2
  Top Layer w12: 1238.23,501.02 U1_M2.10@1238.23,537.8
  Top Layer w15: 1238.23,501.02 1255.25,484 1255.25,434
  Top Layer w39: 1255.25,434 1305.25,384 1305.25,275.25 1265,235 M1_M2.1@1265,135
NetC9_M3_1: C9_M3.1 M1_M3.1 U1_M3.10 | length 476
  Top Layer w12: 2633.23,501.02 U1_M3.10@2633.23,537.8
  Top Layer w15: 2633.23,501.02 2650.25,484 2650.25,434
  Top Layer w39: 2650.25,434 2700.25,384 2700.25,314.75 2810,205 M1_M3.1@2810,135
NetC12_M1_1: C12_M1.1 M1_M1.2 U1_M1.8 | length 466.2
  Top Layer w12: 497.05,452.2 U1_M1.8@497.05,537.8
  Top Layer w18: 497.05,452.2 519.25,430
  Top Layer w39: 519.25,430 519.25,280.75 650,150 M1_M1.2@650,135
NetC12_M2_1: C12_M2.1 M1_M2.2 U1_M2.8 | length 430.3
  Top Layer w12: 1187.05,452.2 U1_M2.8@1187.05,537.8
  Top Layer w18: 1187.05,452.2 1209.25,430
  Top Layer w39: M1_M2.2@1165,135 1165,230.75 1209.25,275 1209.25,430
NetC12_M3_1: C12_M3.1 M1_M3.2 U1_M3.8 | length 455.8
  Top Layer w12: 2582.05,452.2 U1_M3.8@2582.05,537.8
  Top Layer w18: 2582.05,452.2 2604.25,430
  Top Layer w39: 2604.25,430 2604.25,285.75 2710,180 M1_M3.2@2710,135
NetC17_2: C17.2 R19.1 U3.3 | length 201.8
  Top Layer w8: C17.2@1613.74,428.94 1616.18,431.38 1679.04,431.38 1754.84,507.18 U3.3@1754.84,535.43
NetC18_1: C18.1 U3.1 | length 219.5
  Top Layer w8: C18.1@1558.74,430.08 1558.74,445.94 1587.19,474.39 1679.63,474.39 1703.66,498.42 U3.1@1703.66,535.43
NetC18_2: C18.2 U3.2 | length 273.2
  Top Layer w8: C18.2@1558.74,392.38 1567.97,392.38 1585.43,409.84 1585.43,451.42 1593.4,459.39 1685.84,459.39 1729.25,502.8 U3.2@1729.25,535.43
NetC19_2: C19.2 U3.15 | length 88.9
  Top Layer w8: U3.15@2036.34,759.84 2036.34,803.98 2063.74,831.38 C19.2@2063.74,837.38
NetC20_1: C20.1 R20.2 TP16.1 TP25.1 U3.12 U3.13 | length 346.8
  Top Layer w7: U3.12@1985.16,535.43 U3.13@2010.75,535.43 2010.75,502.64 2085.75,427.64 2085.75,406.89 v4(2100,392.64)
  Top Layer w8: C20.1@2151,447.64 2180,447.64 v4(2180,422.64)
  Bottom Layer w8: v4(2100,392.64) TP16.1@2145,392.64 ; TP16.1@2150,392.64 v4(2180,422.64)
NetC21_1: C21.1 M2.4 M3.4 U3.5 | length 1005.1
  Top Layer w12: 1806.02,498.66 U3.5@1806.02,535.43
  Top Layer w15: 1787,432.12 1790.76,435.88 1790.76,483.4 1806.02,498.66
  Top Layer w39: M2.4@1480,135 1480,210 1560,290 1705,290 1735,320 1735,368.95 1735.24,369.19 1735.24,380.36 1787,432.12
  Bottom Layer w39: v2(1700,290) 1725,265 1735.04,265 1737.54,267.5 1902.5,267.5 1995,175 M3.4@1995,135
NetC22_1: C22.1 M2.3 M3.3 U3.7 | length 1229.2
  Top Layer w12: 1857.2,449.84 U3.7@1857.2,535.43
  Top Layer w18: 1835,427.64 1857.2,449.84
  Top Layer w39: M2.3@1580,135 1580,214 1610,244 1794,244 1835,285 1835,427.64
  Bottom Layer w39: M2.3@1580,135 1580,125.1 1663.6,41.5 2015,41.5 2095,121.5 M3.3@2095,135
NetC23_1: C23.1 M2.1 M3.1 U3.10 | length 1276.3
  Top Layer w12: 1933.98,498.66 U3.10@1933.98,535.43
  Top Layer w15: 1933.98,498.66 1951,481.64 1951,431.64
  Top Layer w39: M2.1@1780,135 1873.5,41.5 2225,41.5 2295,111.5 M3.1@2295,135 2295,240 2244,291 2039,291 2001,329 2001,381.64 1951,431.64
NetC26_1: C26.1 M2.2 M3.2 U3.8 | length 946.9
  Top Layer w12: 1882.8,449.84 U3.8@1882.8,535.43
  Top Layer w18: 1882.8,449.84 1905,427.64
  Top Layer w39: v2(1845,215) 1905,275 ; 1905,427.64 1905,275 ; M3.2@2195,135 2195,195 2145,245 1935,245 1905,275
  Bottom Layer w39: M2.2@1680,135 1680,144.9 1756.6,221.5 1838.5,221.5 v2(1845,215)
NetC28_1: C28.1 U4.10 | length 93.7
  Top Layer w12: U4.10@3382.8,2639.8 3383.1,2639.5 3467.5,2639.5 C28.1@3473.77,2645.77
NetC28_2: C28.2 D15.C L1.1 U4.9 | length 475.6
  Top Layer w12: U4.9@3382.8,2620.11 3464.12,2620.11 3492,2592.23 3540.97,2543.26 3660,2543.26 3660,2493.74 D15.C@3742.74,2411
NetC32_1: C32.1 U4.4 | length 112
  Top Layer w8: C32.1@3176.3,2501 3161.52,2515.78 3161.52,2570.29 3171.97,2580.74 U4.4@3193.83,2580.74
NetC36_2: C36.2 U6.25 X1.1 | length 258.9
  Top Layer w8: X1.1@1405,2075 1455,2025 1455,1974 C36.2@1459,1970 1482,1947 1501.79,1947 1538.78,1910.01 U6.25@1538.78,1883.15